# Altium PCB touch-24-v3.PcbDoc
Units mm, origin at the board's own origin, x right, y up, seen from the top; angles counter-clockwise.
Board outline 151 x 86.38 mm, 2 copper layers (Top Layer, Bottom Layer); 49 components, 42 nets, 145 pads, 24 vias.
Unrouted connection lines stored in the file: 2.
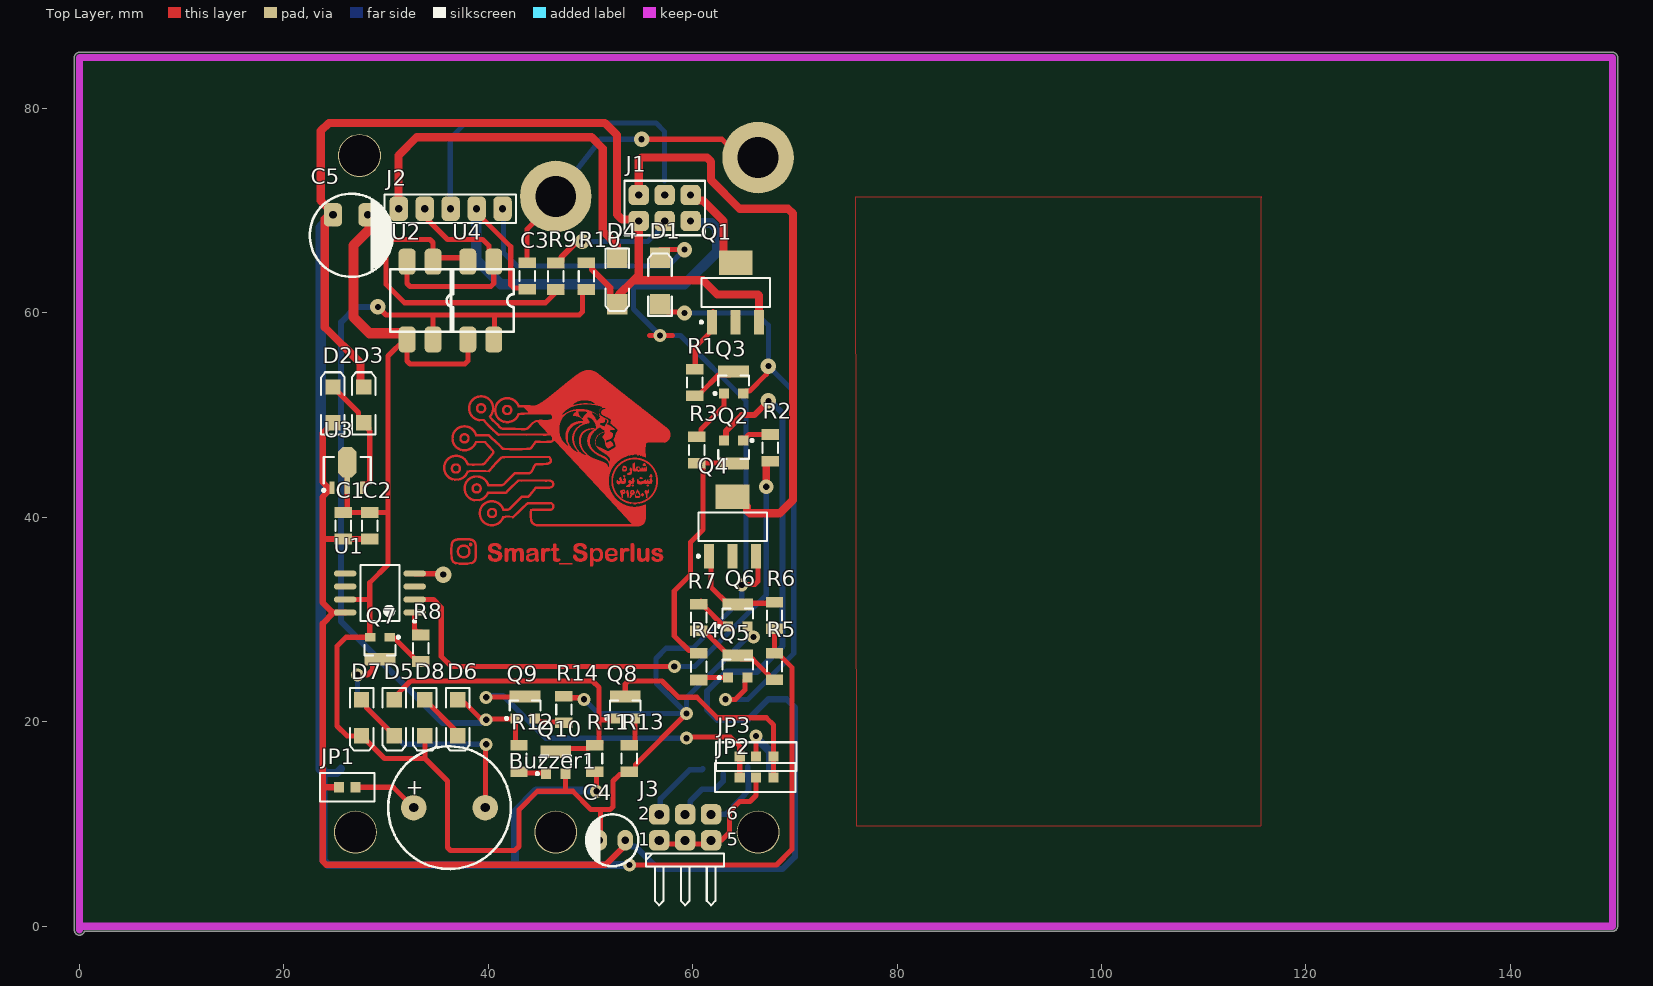
[diagram p0: Top Layer view]
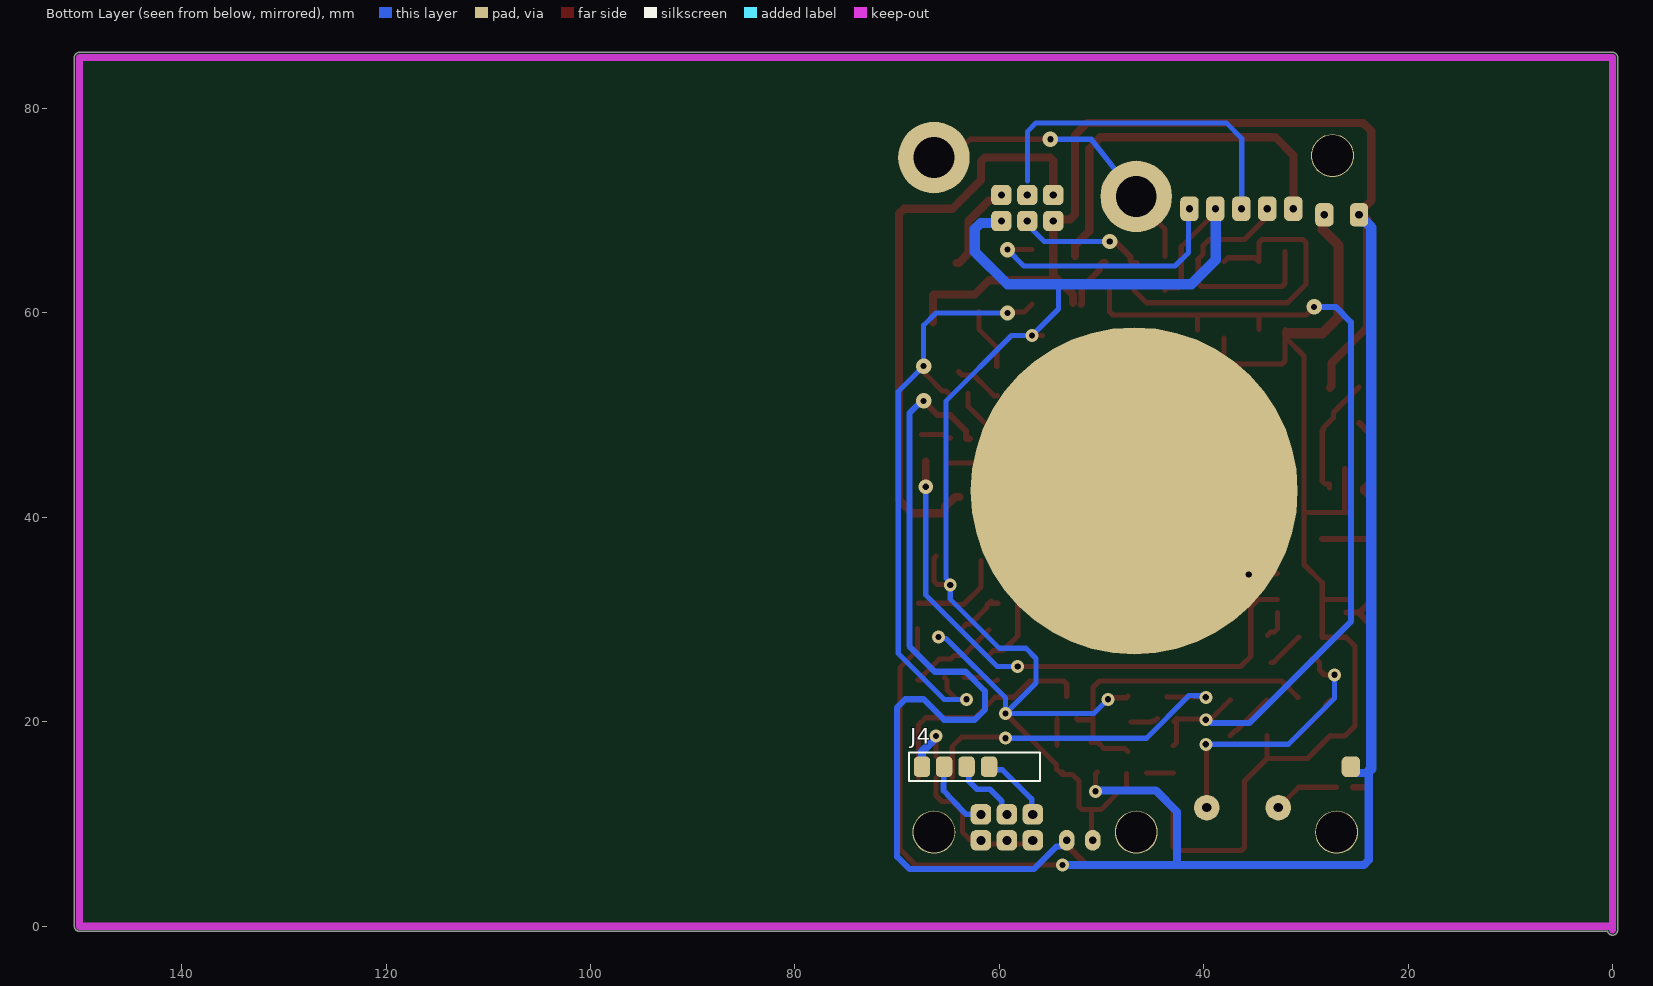
[diagram p1: Bottom Layer view, seen from below]

## Layer stack, top to bottom
Top Solder: solder mask 0.0102, Solder Resist, Dk 3.5
Top Layer: signal copper 0.0356
Dielectric 1: dielectric 0.32, FR-4, Dk 4.8
Bottom Layer: signal copper 0.0356
Bottom Solder: solder mask 0.0102, Solder Resist, Dk 3.5

## Board outline
-0.5,-0.381 -0.5,85 cw(c0,85) 0,85.5 150,85.5 cw(c150,85) 150.5,85 150.5,0 cw(c150,0) 150,-0.5 0.486,-0.5 cw(c0,-0.381)

## Design rules (kind name [scope] priority, off if disabled: settings)
Clearance Clearance_1 [InPolygon] p1: gap=1 ignorepadtopadclearanceinfootprint=FALSE
Clearance [All] p2: gap=0.4 ignorepadtopadclearanceinfootprint=FALSE
PolygonConnect [All] p1: connectstyle=Relief reliefconductorwidth=0.254 reliefentries=4 polygonreliefangle="90 Angle" airgapwidth=0.254
RoutingLayers [All] p1: top layer_v5=FALSE bottom layer_v5=TRUE
RoutingVias [All] p1: holewidth=0.711 width=2.5 viastyle="Through Hole" minholewidth=0.711 minwidth=1.27 maxholewidth=0.711 maxwidth=2
SolderMaskExpansion [All] p1: expansion=0.102 istentingtop=FALSE
Width [All] p1: maxlimit=3 minlimit=0.4 preferedwidth=1
29 further rules are at their usual default settings.

## Components (designator, comment, footprint, x,y, rotation, side; value= is the part's Value field where it differs from the comment)
Buzzer1 "Buzzer" BUZZER 36.2,11.6 r0 top
C1 "=Value" "CAP 1206" 25.8,39.2 r270 top
C2 "=Value" "CAP 1206" 28.4,39.2 r270 top
C3 "=Value" "CAP 1206" 43.8,63.6 r90 top
C4 "=Value" ELEC-CAP-RAD10-20 52.13,8.4 r0 top
C5 "=Value" ELEC-CAP-RAD15-30 26.6,67.6 r180 top
D1 "D Tunnel1" 3.2X1.6X1.1#1 56.8,62.6 r90 top
D2 "D Tunnel1" 3.2X1.6X1.1#2 24.8,51 r90 top
D3 "D Tunnel1" 3.2X1.6X1.1#2 27.8,51 r90 top
D4 "D Tunnel1" 3.2X1.6X1.1#3 52.6,63.4 r270 top
D5 "D Tunnel1" 3.2X1.6X1.1#2 30.8,20.4 r270 top
D6 "D Tunnel1" 3.2X1.6X1.1#2 37,20.4 r270 top
D7 "D Tunnel1" 3.2X1.6X1.1#2 27.6,20.4 r270 top
D8 "D Tunnel1" 3.2X1.6X1.1#2 33.8,20.4 r270 top
J1 "Header3X2" "HEADER 3X2" 54.72,71.54 r0 top
J2 "Header5X1" "HEADER 5X1"#1 31.24,70.2 r0 top
J3 "Header 3X2H" HDR2X3H 56.72,8.4 r0 top
J4 "Header5X1" "HEADER 5X1"#2 57.4,15.6 r0 bottom
JP1 "Jumper" "Header 2X1" 26.2,13.6 r180 top
JP2 "Jumper Selector" "Jumper Selector"#1 68.68,14.546 r180 top
JP3 "Jumper Selector" "Jumper Selector"#2 68.74,16.6 r180 top
Q1 "MOSFET-P4" SOT223_N 64.2,62 r90 top
Q2 "PNP" SOT-23B_N 64,46.4 r270 top
Q3 "QNPN" SOT-23B_L#1 64,53.2 r90 top
Q4 "MOSFET-P4" SOT223_N 63.9,39.1 r90 top
Q5 "QNPN" SOT-23B_L#1 64.4,25.4 r90 top
Q6 "QNPN" SOT-23B_L#1 64.4,30.4 r90 top
Q7 "QNPN" SOT-23B_L#2 29.4,27.2 r270 top
Q8 "QNPN" SOT-23B_L#1 53.4,21.4 r90 top
Q9 "QNPN" SOT-23B_L#1 43.6,21.4 r90 top
Q10 "QNPN" SOT-23B_L#1 46.6,16 r90 top
R1 "10K" "RES 1206 (3216X08L)" 60.2,53.2 r90 top
R2 "10K" "RES 1206 (3216X08L)" 67.6,46.8 r90 top
R3 "10K" "RES 1206 (3216X08L)" 60.4,46.6 r90 top
R4 "10K" "RES 1206 (3216X08L)" 60.6,25.4 r270 top
R5 "10K" "RES 1206 (3216X08L)" 68,25.4 r90 top
R6 "10K" "RES 1206 (3216X08L)" 68,30.4 r90 top
R7 "10K" "RES 1206 (3216X08L)" 60.6,30.2 r90 top
R8 "10K" "RES 1206 (3216X08L)" 33.4,27.2 r270 top
R9 "10K" "RES 1206 (3216X08L)" 46.6,63.6 r270 top
R10 "10K" "RES 1206 (3216X08L)" 49.6,63.6 r90 top
R11 "10K" "RES 1206 (3216X08L)" 50.4,16.4 r270 top
R12 "10K" "RES 1206 (3216X08L)" 43,16.4 r270 top
R13 "10K" "RES 1206 (3216X08L)" 53.8,16.4 r90 top
R14 "10K" "RES 1206 (3216X08L)" 47.4,21.2 r270 top
U1 "ATtiny15L-1SC" 8S2_N 29.4,32.6 r180 top
U2 "PC817" DIP4 34.6,65.02 r270 top
U3 "LM1117MP-3.3" SOT89L 26.2,44.6 r90 top
U4 "PC817" DIP4 40.54,65.02 r270 top

## Footprints (in the part's own frame and the unit in brackets; to place one, negate y for a bottom-side part, rotate by r counter-clockwise, add the part's x,y. Pads: shape width x height; smd on the part's side, far side on the other; paste and mask are expansions set on the pad)
3.2X1.6X1.1#1 [mm] "SMT LED; 2 Flat Leads"
  rect 2x2 smd: 1(-1.75,0) 2(2.8,0)
  silkscreen extent -2.9,-1.15 3.2,1.15
3.2X1.6X1.1#2 [mm] "SMT LED; 2 Flat Leads"
  rect 1.5x1.5 smd: 1(-1.75,0) 2(1.75,0)
  silkscreen extent -2.9,-1.15 3.2,1.15
3.2X1.6X1.1#3 [mm] "SMT LED; 2 Flat Leads"
  rect 2x2 smd: 1(-2,0) 2(2.55,0)
  silkscreen extent -2.9,-1.15 3.2,1.15
8S2_N [mm] "SOP, 8-Leads, Body 5.3x5.3mm, Pitch 1.27mm, IPC Medium Density"
  oval 2.2x0.6 smd: 1(-3.4,1.905) 2(-3.4,0.635) 3(-3.4,-0.635) 4(-3.4,-1.905) 5(3.4,-1.905) 6(3.4,-0.635) 7(3.4,0.635) 8(3.4,1.905)
  silkscreen extent -3.52,-2.75 1.9,2.88, body extent -2.73,-2.75 2.73,2.75, height 2.16
BUZZER [mm] "BUZZER"
  round 2.5 hole 0.9: 1(-3.5,0) 2(3.5,0)
  silkscreen extent -6,-6 6,6
"CAP 1206" [mm]
  rect 1.05x1.7 smd: 1(-1.27,0) 2(1.326,0)
  silkscreen extent -0.47,-0.75 0.53,0.75, body extent -1.49,-0.77 1.55,0.75, height 0.75
DIP4 [mil]
  rrect50% 100x65 smd: 1(0,0) 2(0,-100) 3(300,-100) 4(300,0)
  silkscreen extent 30,-165 270,77, body extent -5,-140 305,40, height 169
ELEC-CAP-RAD10-20 [mil]
  oval 60x80 hole 30: 1(-50,0) 2(50,0)
  silkscreen extent -100,-100 100,100, body extent -124,-124 124,124, height 404
ELEC-CAP-RAD15-30 [mil]
  rrect50% 70x90 hole 30: 1(-62.99,-78.74) 2(70.87,-78.74)
  silkscreen extent -160,-160 160,160, body extent -167,-167 167,167, height 609
HDR2X3H [mm] "Connector; Header; 3x2 Position; Right Angle"
  rrect50% 2x2 hole 0.9: 1(0,0) 2(0,2.54) 3(2.54,0) 4(2.54,2.54) 5(5.08,0) 6(5.08,2.54)
  silkscreen extent -1.27,-6.35 6.35,-1.27
"Header 2X1" [mm]
  rect 1x1 smd: 1(-0.8,0) 2(0.8,0)
  silkscreen extent -2.67,-1.4 2.67,1.4, body extent -2.54,-1.27 2.54,1.27, height 9.5
"HEADER 3X2" [mm]
  rrect50% 2x2 hole 0.7: 1(0,0) 2(0,-2.54) 3(2.54,0) 4(2.54,-2.54) 5(5.08,0) 6(5.08,-2.54)
  silkscreen extent -1.4,-3.94 6.48,1.4, body extent -1.3,-3.81 6.32,1.27, height 8.38
"HEADER 5X1"#1 [mm]
  rrect50% 1.8x2.4 hole 0.7: 1(0,0) 2(2.54,0) 3(5.08,0) 4(7.62,0) 5(10.16,0)
  silkscreen extent -1.4,-1.4 11.46,1.4, body extent -1.22,-1.19 11.48,1.35, height 8.38
"HEADER 5X1"#2 [mm]
  rrect50% 1.8x2 smd: 1(-31.8,0)
  rrect50% 1.6x2 smd: 2(3.6,0) 3(5.8,0) 4(8,0) 5(10.16,0)
  silkscreen extent -1.4,-1.4 11.46,1.4, body extent -1.22,-1.19 11.48,1.35, height 8.38
"Jumper Selector"#1 [mm]
  rect 1x1 smd: 1(2.48,0) 2(0.78,0) 3(4.08,0)
  silkscreen extent -1.4,-1.4 6.48,1.4, body extent -1.24,-1.27 6.38,1.27, height 10.16
"Jumper Selector"#2 [mm]
  rect 1x1 smd: 1(2.54,0) 2(0.84,0) 3(4.14,0)
  silkscreen extent -1.4,-1.4 6.48,1.4, body extent -1.24,-1.27 6.38,1.27, height 10.16
"RES 1206 (3216X08L)" [mm] "Chip Resistor, 2-Leads, Body 3.2x1.6mm, IPC High Density _ (0.125 W)"
  rect 1.05x1.7 smd: 1(-1.295,0) 2(1.301,0)
  silkscreen extent -0.5,-0.75 0.5,0.75, body extent -1.52,-0.76 1.53,0.76, height 0.6
SOT89L [mm] "SOT89, 3-Leads, Body 4.5x2.4 mm, Pitch 1.5mm, Lead Span 4.1mm, IPC High Density"
  rect 1.2x0.5 smd: 1(-1.7,1.5) 3(-1.7,-1.5)
  rect 1.6x0.5 smd: 2(-1.5,0)
  oct 3x1.8 smd: 2(0.8,0)
  silkscreen extent -2.07,-2.3 1.3,2.42, body extent -1.3,-2.3 1.3,2.3, height 1.6
SOT223_N [mm] "SOT223, 4-Leads, Body 6.5x3.5mm, Pitch 2.3mm, Lead Span 7mm, IPC Medium Density"
  rect 2.4x1 smd: 1(-2.9,2.3) 2(-2.9,0) 3(-2.9,-2.3)
  rect 2.4x3.3 smd: 4(2.9,0)
  silkscreen extent -3.02,-3.35 1.4,3.47, body extent -1.85,-3.35 1.85,3.35, height 1.7
SOT-23B_L#1 [mm] "SOT23, 3-Leads, Body 2.9x1.3mm, Pitch 0.95mm, Lead Span 2.4mm, IPC High Density"
  rect 1x1 smd: 1(-1.075,0.95) 2(-1.075,-0.95)
  rect 1.2x3 smd: 3(1.075,0)
  silkscreen extent -1.2,-1.5 0.7,1.92, body extent -0.7,-1.5 0.7,1.5, height 1.14
SOT-23B_L#2 [mm] "SOT23, 3-Leads, Body 2.9x1.3mm, Pitch 0.95mm, Lead Span 2.4mm, IPC High Density"
  rect 0.85x1 smd: 1(-1.075,0.95) 2(-1.075,-0.95)
  rect 1.2x3 smd: 3(1.075,0)
  silkscreen extent -1.2,-1.5 0.7,1.93, body extent -0.7,-1.5 0.7,1.5, height 1.14
SOT-23B_N [mm] "SOT23, 3-Leads, Body 2.9x1.3mm, Pitch 0.95mm, Lead Span 2.4mm, IPC Medium Density"
  rect 1x1 smd: 1(-1.125,0.95) 2(-1.125,-0.95)
  rect 1.2x3 smd: 3(1.125,0)
  silkscreen extent -1.25,-1.5 0.7,1.93, body extent -0.7,-1.5 0.7,1.5, height 1.14

## Part data
C1 C2 C3: library part Capacitor, "Capacitor"
C4 C5: library part "Capacitor Electrolytic", "Electrolytic Capacitor"
D1 D2 D3 D4 D5 D6 D7 D8: "Tunnel Diode - RLC Model", LatestRevisionDate=17-Jul-2002, LatestRevisionNote="Re-released for DXP Platform.", PackageDescription="SM LED; 2 Flat Leads", PackageReference=3.2X1.6X1.1, PackageVersion=Feb-2002, Published=8-Jun-2000, Publisher="Altium Limited"
J3: "Header, 3-Pin, Dual row, Right Angle", LatestRevisionDate=17-Jul-2002, LatestRevisionNote="Re-released for DXP Platform.", Publisher="Altium Limited"
Q1 Q4: "P-Channel MOSFET, Externally Terminated Substrate", Code_IPC=SOT223-4, Code_JEDEC=TO-261-AA-B, Code_JEITA=SC-75, LatestRevisionDate=29-May-2009, LatestRevisionNote="IPC-7351 Footprint Added.", PackageDescription="4-Pin SOT-223 Package 2.3 mm Pitch, 7 mm Lead Span", PackageReference=SOT223, PackageVersion=2002, Published=24-Mar-1999, Publisher="Altium Limited"
Q2: "PNP Bipolar Transistor", LatestRevisionDate=29-May-2009, LatestRevisionNote="IPC-7351 Footprint Added.", PackageDescription="3-Pin SOT-23 Package 0.95 mm Pitch, 2.4 mm Lead Span", PackageReference=SOT-23B, PackageVersion=Aug-1999, Published=8-Jun-2000, Publisher="Altium Limited"
Q3 Q5 Q6 Q7 Q8 Q9 Q10: "NPN Bipolar Transistor", LatestRevisionDate=29-May-2009, LatestRevisionNote="IPC-7351 Footprint Added.", PackageDescription="3-Pin SOT-23 Package 0.95 mm Pitch, 2.4 mm Lead Span", PackageReference=SOT-23B, PackageVersion=Aug-1999, Published=8-Jun-2000, Publisher="Altium Limited"
R1 R2 R3 R4 R5 R6 R7 R8 R9 R10 R11 R12 R13 R14: library part Resistor, "Resistor", Power="1/4 W", Tolerance=5%
U1: "8-Bit AVR Microcontroller with 1K Byte of Flash Memory", Supplier Part Number 1=ATTINY15L-1SC-ND, ComponentLink1Description=Datasheet, ComponentLink1URL=http://www.atmel.com/dyn/resources/prod_documents/doc1187.pdf, ComponentLink2Description="Atmel.com Home", ComponentLink2URL=http://www.atmel.com, DatasheetVersion=1187E-AVR-06/02, LatestRevisionDate=16-Oct-2006, LatestRevisionNote="IPC-7351 Footprint Added.", PackageDescription="8-Lead, 0.208\" Body, Plastic Small Outline Package (EIAJ)", PackageReference=8S2, PackageVersion="revF, Apr-2008", Published=17-Sep-2003, Publisher="Altium Limited", Supplier 1=Digi-Key, Supplier 2=Mouser, Supplier Part Number 2=556-ATTINY15L1SC
U2 U4: library part OPTCOUPLER_01, "4-Pin Phototransistor Optocoupler"
U3: "800mA Low-Dropout Linear Regulator", DigiKeyPartNumber=LM1117MP-3.3CT-ND, Manufacturer="National Semiconductor", PackageTopMarking=XYTT*N05A, PowerWise=N, Code_IPC=SOT223-4, Code_JEDEC=TO-261-AA, ComponentLink1Description="LM1117 Datasheet", ComponentLink1URL=http://www.national.com/ds/LM/LM1117.pdf, ComponentLink2Description="LM1117 Web Page", ComponentLink2URL=http://www.national.com/pf/LM/LM1117.html, ComponentLink3Description="MP04A Package Page", ComponentLink3URL=http://www.national.com/packaging/folders/mp04a.html, CompType="LDO IC", DatasheetVersion=Apr-2006, PackageDescription="Molded SOT-223, 6.50 x 3.56 x 1.6mm Body, 4 Lead, 2.3mm Pitch", PackageReference=MP04A, PackageVersion="revB, Apr-2003", PartNumber=LM1117MP-3.3, PinCount=4, Published=4-Dec-2008, Publisher="Altium Limited", RoHS=O
Buzzer1: ComponentLinkURL=www.picpars.com, Designer="Seyed Mohsen Ghasemain"

## Free pads (board coordinates)
  round 4.2 hole 4: 2(27.4,75.4) 2(66.4,9.2) 3(27,9.2) 4(46.6,9.2)
  round 7 hole 4: 5(46.6,71.4) 5(66.4,75.2)
  round 32 smd far side: 6(46.8,42.6)

## Via types
v1: diameter 1.27, hole 0.6, Top Layer to Bottom Layer, 15 vias
v2: diameter 1.5, hole 0.6, Top Layer to Bottom Layer, 7 vias
v3: diameter 1.4, hole 0.6, Top Layer to Bottom Layer, 1 vias
v4: diameter 1.6, hole 0.6, Top Layer to Bottom Layer, 1 vias

## Nets (pads, with @x,y where several pads share a name; then routed paths per layer and width w, separated by ;. In a path a pad name is that pad's centre, name@x,y a point inside that pad or via, vN(x,y) a via of type N, cw(c..) or ccw(c..) an arc to the next point about the centre after c; other vN are vias at no path point)
ACS: D1.2 J2.5 | length 25.7
  Top Layer w0.5: D1.2@56.8,66.2 v2(59.2,66.2)
  Bottom Layer w0.5: J2.5@41.4,70.297 41.497,70.2 41.497,65.903 42.8,64.6 57.6,64.6 v2(59.2,66.2)
bizer: R8.1 U1.1 | length 2.8
  Top Layer w0.5: U1.1 32.8,29.063 33.093,28.77 33.461,28.77 R8.1@33.768,28.463
GND: C1.1 C2.1 C3.1 C4.1 C5.1 D7.2 D8.2 J1.6 J2.4 pad.2@27.4,75.4 Q4.3 Q6.2 Q7.2 Q10.2 R13.1 R14.1 U1.7 U2.3 U3.2 U4.3 | length 272.1
  Top Layer w0.5: C1.1 C1.1@26.2,40.47 ; U1.7 28.4,31.965 ; U3.2@26.2,44.8 26.2,43.1 C1.1@26.2,40.47 ; D7.2@27.6,18.6 26.2,18.6 25.2,19.6 25.2,27.4 26.075,28.275 28.4,28.275 28.4,31.965 ; D7.2 29.85,16.4 33.8,16.4 ; C2.1@27.965,40.47 C1.1@26.2,40.47 ; C2.1@28,40.47 C2.1 30.2,40.47 ; U2.3@32.06,58.4 U2.3@32.06,57.48 ; D8.2 33.8,16.4 ; U4.3@38,57.543 U4.3 38,55.293 37.707,55 32.353,55 32.06,55.293 U2.3 U2.3@32.06,57.48 ; J2.4@38.88,69.8 42.2,66.48 42.2,62.751 42.493,62.459 43.549,62.459 C3.1@43.807,62.2 ; R14.1 47.548,22.347 49.218,22.347 v1(49.365,22.2) ; Q10.2 47.55,13.2 ; C4.1@50.86,8.2 50.984,8.324 50.984,11.4 ; R13.1 54.125,15.105 54.4,15.38 54.4,15.8 v1(59.4,20.8) ; R13.1@53.85,14.83 52.83,14.83 52.2,14.2 52.2,11.693 51.907,11.4 50.984,11.4 ; 55.8,57.8 v1(56.8,57.8) 58,57.8 ; v1(64.8,33.4) 64.852,33.452 66.107,33.452 66.4,33.744 66.4,36 Q4.3 ; 28.4,31.965 28.4,33.6 30.2,35.4 30.2,40.47 ; 30.2,40.47 30.2,55.8 31.88,57.48 U2.3@32.06,57.48 ; 33.8,16.4 36,14.2 36,7.693 36.293,7.4 42.6,7.4 43,7.8 43,11.4 44.8,13.2 47.55,13.2 ; 47.55,13.2 48.26,13.2 50.06,11.4 50.984,11.4
  Top Layer w1: C5.1@28.384,69.6 28.384,68.184 26.8,66.6 26.8,59.6 28.376,58.024 U2.3@31.86,58.024
  Bottom Layer w0.5: v1(49.365,22.2) 50.765,20.8 v1(59.4,20.8) ; 54.2,62.8 54.2,60.4 v1(56.8,57.8) 58.8,57.8 65.2,51.4 65.2,34.008 64.8,33.608 v1(64.8,33.4) 64.8,32 60,27.2 57.4,27.2 56.4,26.2 56.4,23.8 v1(59.4,20.8) ; v1(65.945,28.309) 65.798,28.162 65.218,28.162 59.4,22.344 v1(59.4,20.8)
  Bottom Layer w1: J2.4@38.82,69.8 38.82,65.2 41.22,62.8 54.2,62.8 59.2,62.8 62.4,66 62.4,68.214 61.814,68.8 J1.6@59.735,68.8
key: J1.3 J2.3 | length 32.4
  Bottom Layer w0.5: 36.28,71.4 36.28,77.08 37.8,78.6 56.4,78.6 57.26,77.74 57.26,72.94
key+: J1.5 Q1.4 | length 9
  Top Layer w0.8: J1.5 60.338,71.002 60.998,71.002 63,69 63,65.85 63.95,64.9 Q1.4
key-: J1.1 Q4.4 | length 57.2
  Top Layer w0.8: J1.1 54.72,74.907 55.013,75.2 61.4,75.2 61.8,74.8 61.8,73 64.6,70.2 69.331,70.2 69.8,69.731 69.8,41.693 68.507,40.4 65.593,40.4 65.3,40.693 65.3,41.05 64.35,42 Q4.4
L1: J3.6 J4.4 | length 7
  Bottom Layer w0.55: J3.6 62.3,10.953 63.264,10.979 63.424,11.139 65.455,13.28 65.455,13.507 65.455,13.514 J4.4
L2: J3.4 J4.3 | length 6.3
  Bottom Layer w0.55: J3.4 59.748,11.428 59.748,12.226 60.922,13.4 62.2,13.4 62.984,14.184 62.984,14.885 62.997,14.898 J4.3@63,14.898
L3: J3.2 J4.2 | length 6.9
  Bottom Layer w0.55: J3.2 56.843,11.063 56.843,12.443 59.697,15.297 60.897,15.297 J4.2@61,15.4
led: D6.1 Q9.1 R10.1 R12.1 U2.4 U4.4 | length 86.4
  Top Layer w0.5: v2(29.2,60.6) 30,59.8 34.6,59.8 ; U2.4@34.6,58.4 34.6,59.8 ; D6.1@37.4,22.15 39.203,20.347 39.653,20.347 v1(39.8,20.2) 39.863,20.263 42.587,20.263 Q9.1 ; U4.4@40.6,58.354 40.6,59.8 ; Q9.1@42.907,20.053 42.65,20.053 42.65,17.97 42.925,17.695 R12.1 ; R10.1@49.2,62.305 49.2,60.093 48.907,59.8 40.6,59.8 ; 34.6,59.8 40.6,59.8
  Bottom Layer w0.6: v2(29.2,60.6) 27.085,60.6 25.6,59.115 25.6,29.8 35.514,19.886 39.305,19.886 39.619,20.2 v1(39.8,20.2)
"led IN": J2.2 U2.2 U4.1 | length 23.2
  Top Layer w0.5: U2.2@32.06,66.02 32.06,62.893 32.353,62.6 40.247,62.6 40.54,62.893 U4.1@40.54,65.2 ; J2.2@33.8,69.4 36,67.2 39.452,67.2 40.065,66.587 40.065,65.735 U4.1@40.6,65.2
Lw: J4.5 JP3.1 | length 5.8
  Top Layer w0.5: JP3.1 v1(66.2,18.6)
  Bottom Layer w0.8: v1(66.2,18.6) 66.2,18.473 67.56,17.113 J4.5@67.56,15.4
NetBuzzer1_1: Buzzer1.1 JP1.1 | length 6.5
  Top Layer w0.5: JP1.1 30.7,13.6 Buzzer1.1
NetBuzzer1_2: Buzzer1.2 Q7.3 | length 26.1
  Top Layer w0.5: v1(27.2,24.6) 27.221,24.579 28.179,24.579 28.668,25.068 28.668,25.775 29.018,26.125 Q7.3@29.45,26.125 ; Buzzer1.2@39.8,11.8 39.725,11.875 39.725,17.725 v1(39.8,17.8)
  Bottom Layer w0.5: v1(27.2,24.6) 27.2,22.292 31.692,17.8 v1(39.8,17.8)
NetD1_1: D1.1 Q3.2 Q5.2 | length 60.6
  Top Layer w0.5: D1.1 57.55,60.1 59.1,60.1 v2(59.2,60) ; v1(63.2,22.2) 64.2,22.2 65.1,23.1 65.1,24.075 Q5.2 ; Q3.2 65.2,52.375 65.575,52.375 67.209,54.009 67.209,54.609 v2(67.4,54.8)
  Bottom Layer w0.5: v2(59.2,60) 66.2,60 67.4,58.8 v2(67.4,54.8) 69.885,52.315 69.885,26.685 65.4,22.2 v1(63.2,22.2)
NetD2_2: D2.2 D3.1 U3.3 | length 12
  Top Layer w0.5: D2.2 27.3,50.25 27.3,49.75 D3.1 ; U3.3 27.7,43.25 28.107,43.25 28.4,43.543 28.4,48.45 28.3,48.55 28.3,48.75 D3.1@27.7,49.35
NetD4_1: D4.1 J2.1 | length 37.6
  Top Layer w0.8: J2.1@31.2,70.067 31.2,75.4 33,77.2 50.1,77.2 51.2,76.1 51.2,68 52.6,66.6 D4.1@52.6,65.6
NetD5_1: D5.1 Q8.1 Q10.3 R11.1 | length 32.1
  Top Layer w0.5: D5.1@30.8,22.4 32.4,24 50.2,24 50.85,23.35 50.85,20.2 ; Q10.3@47.4,17.075 47.725,17.4 49.78,17.4 50.35,17.97 51,17.97 50.85,17.97 50.85,20.2 ; Q8.1 52.325,20.2 50.85,20.2
NetD5_2: D5.2 D7.1 | length 4.8
  Top Layer w0.5: D7.1 28.1,21.65 28.1,21.35 D5.2
NetD6_2: D6.2 D8.1 | length 5
  Top Layer w0.5: D8.1 36.8,19.15 36.9,19.15 D6.2@37.4,18.65
NetJ1_4: J1.4 R9.1 | length 12.4
  Top Layer w0.6: R9.1 46.925,64.895 47.15,65.12 47.15,65.445 48.532,66.828 49.028,66.828 v2(49.2,67)
  Bottom Layer w0.5: v2(49.2,67) 55.6,67 J1.4@57.26,68.66
NetJ3_1: J3.1 J3.3 J3.5 JP2.1 | length 13.8
  Top Layer w0.5: J3.1@57.493,8.087 57.52,8.06 J3.5@62.14,8.06 ; J3.5 62.127,8.4 62.187,8.461 62.861,8.461 63.6,9.2 63.6,11.2 64.6,12.2 65.6,12.2 66.2,12.8 JP2.1 ; J3.5@62.127,8.213 J3.5@62.14,8.2
NetJP2_2: JP2.2 JP3.2 Q8.3 | length 22.8
  Top Layer w0.5: Q8.3 53.4,23.707 53.693,24 57,24 58.6,22.4 60.4,22.4 62.4,20.4 67.2,20.4 67.9,19.7 JP3.2 JP2.2
NetJP2_3: JP2.3 JP3.3 Q9.3 | length 33.9
  Top Layer w0.5: v1(39.8,22.4) 39.837,22.438 43.562,22.438 Q9.3 ; v1(59.409,18.391) 59.513,18.496 63.704,18.496 64.6,17.6 JP3.3 JP2.3
  Bottom Layer w0.5: v1(39.8,22.4) 39.947,22.547 40.917,22.547 40.935,22.565 41.435,22.565 45.609,18.391 v1(59.409,18.391)
NetQ1_1: Q1.1 R1.2 | length 6.1
  Top Layer w0.5: R1.2@60.252,54.746 60.252,56.652 62,58.4 Q1.1@62,60.115
NetQ2_1: Q2.3 R3.1 R4.1 | length 26.3
  Top Layer w0.5: R3.1 R3.1@60.725,45.305 ; R4.1@60.946,26.6 60.575,26.97 59.63,26.97 58.2,28.4 58.2,32.8 59.8,34.4 59.8,37.6 61,38.8 61,45.03 R3.1@60.725,45.305 ; Q2.3@65.069,45.305 R3.1@60.725,45.305
NetQ2_2: Q2.1 R2.2 | length 3
  Top Layer w0.5: Q2.1@64.8,47.775 65.2,47.775 65.2,47.808 65.493,48.101 R2.2
NetQ3_1: Q3.3 R1.1 | length 4.8
  Top Layer w0.5: R1.1 60.525,51.905 60.8,52.18 60.8,52.2 62.525,53.925 63.65,53.925 Q3.3
NetQ3_2: Q3.1 R3.2 | length 5.6
  Top Layer w0.5: R3.2@60.2,47.901 60.525,47.901 60.8,48.176 60.8,48.6 63.05,50.85 Q3.1
NetQ4_1: Q4.1 Q6.3 R6.2 | length 9.5
  Top Layer w0.5: Q4.1@61.8,35.771 61.8,33.175 63.5,31.475 Q6.3 64.525,31.6 R6.2@67.9,31.6
NetQ5_1: Q5.3 R5.1 R7.1 | length 9.2
  Top Layer w0.5: R7.1@61,29 63.15,26.85 63.15,26.825 63.5,26.475 Q5.3 64.75,26.125 65.875,26.125 67.4,24.6 67.4,24.38 67.675,24.105 R5.1
NetQ5_2: Q5.1 R4.2 | length 3.1
  Top Layer w0.5: R4.2@60.2,24.099 R4.2@60.26,24.039 ; R4.2@60.6,23.899 60.925,23.899 61.351,24.325 Q5.1
NetQ6_2: Q6.1 R7.2 | length 4.5
  Top Layer w0.5: R7.2@60.125,31.597 R7.2@60.829,31.597 ; R7.2@60.829,31.797 61.2,31.426 61.2,31.2 62.825,29.575 63.2,29.575 Q6.1
NetQ7_2: Q7.1 R8.2 | length 3.7
  Top Layer w0.5: Q7.1@30.707,28.293 32.8,26.2 32.8,26.174 33.162,25.812 R8.2@33.388,25.812
NetQ8_3: Q8.2 R13.2 | length 2.6
  Top Layer w0.5: R13.2@54.35,17.688 Q8.2
NetQ9_3: Q9.2 R14.2 | length 2.7
  Top Layer w0.5: Q9.2 44.8,20.075 44.992,20.075 45.093,19.974 R14.2@47.125,19.974
NetQ10_2: Q10.1 R12.2 | length 2.6
  Top Layer w0.5: R12.2@42.98,15 Q10.1@45.6,15
NetR9_2: R9.2 U2.1 U4.2 | length 32.6
  Top Layer w0.5: U4.2 37.62,65.4 34.98,65.4 U2.1 34.6,66.907 34.307,67.2 30.293,67.2 30,66.907 30,62.8 31.8,61 45.6,61 R9.2@46.8,62.2
out: R2.1 U1.2 | length 55.5
  Top Layer w0.5: U1.2 34.635,31.965 35.4,31.2 35.4,26.4 36.4,25.4 v1(58.2,25.4)
  Top Layer w0.7: v3(67.2,43) R2.1@67.2,45.505
  Bottom Layer w0.5: v1(58.2,25.4) 60.2,25.4 67.2,32.4 v3@67.2,42.6
touch: pad.6 U1.4 | length 2.8
  Top Layer w0.5: U1.4 32.819,34.486 35.514,34.486 v4(35.6,34.4)
vcc: C1.2 C2.2 C4.2 D2.1 JP1.2 Q2.2 U1.8 U3.1 | length 167.6
  Top Layer w0.6: 24.703,30.765 23.8,31.668 23.8,37.951 ; 24.788,30.695 U1.8 ; D2.1 23.8,48.25 23.8,43.45 24.401,42.849 24.401,42.6 23.8,41.999 23.8,37.951 ; 24.847,30.647 23.8,29.6 23.8,13.6 ; JP1.2 23.8,13.6 ; C1.2@25.6,37.874 24,37.874 23.923,37.951 23.8,37.951 ; C1.2 C2.2 ; C4.2@53.5,8.03 51.481,6.011 24.151,6.011 23.8,6.362 23.8,13.6 ; Q2.2@62.888,47.688 63.213,47.688 63.25,47.725 63.25,48.45 64.8,50 66.042,50 67.4,51.358 v2(67.4,51.4)
  Bottom Layer w0.6: C4.2@53.4,8.2 53.596,8.2 53.996,7.8 54.4,7.8 56.6,5.6 68.8,5.6 70,6.8 70,21.4 69.2,22.2 67.4,22.2 65.4,20.2 62.4,20.2 61.4,21.2 61.4,23 63.3,24.9 66.3,24.9 68.8,27.4 68.8,50.2 67.6,51.4 v2(67.4,51.4)
vdd: C5.2 D3.2 D4.2 J1.2 J4.1 Q1.3 R5.2 R6.1 R10.2 R11.2 | length 248.8
  Top Layer w0.5: R11.2 50.6,14.899 v1(50.6,13.2) ; v1(53.8,6) 68.2,6 69.7,7.5 69.7,25.326 68.325,26.701 R5.2 R6.1
  Top Layer w0.6: R10.2@49.6,65 49.826,65 50.15,64.676 50.15,64.25 51.939,62.461 51.939,60.887 D4.2@52.026,60.8
  Top Layer w0.8: C5.2@24.506,69.894 C5.2@24.606,69.794 ; C5.2 C5.2@24.606,69.794 ; D3.2@27.659,52.691 27.5,52.85 27.5,55.1 24,58.6 24,69.188 C5.2@24.606,69.794 ; D4.2@52.8,61 52.8,61.8 54.2,63.2 ; Q1.3 66.5,61.7 66.4,61.8 62.4,61.8 61,63.2 54.2,63.2 ; C5.2@24.606,69.794 24.706,69.894 24.706,70.124 24.514,70.316 24.284,70.316 23.6,71 23.6,77.8 24.4,78.6 51.4,78.6 52.6,77.4 52.6,69.621 53.069,69.153 54.567,69.153 J1.2 54.72,63.72 54.2,63.2
  Bottom Layer w0.8: 23.85,15.15 23.85,15 ; J4.1@25.6,15.4 25.2,15 23.85,15 ; v1(50.6,13.2) 50.51,13.29 44.69,13.29 42.6,11.2 42.6,6 ; v1(53.8,6) 42.6,6 ; 23.85,15 23.85,6.469 24.319,6 42.6,6
  Bottom Layer w1: 23.85,15.15 23.6,15.4 23.6,68.371 24.186,68.957 24.611,68.957 25,69.346 C5.2@25,69.6
pads on no net: C3.2 Q1.2 Q4.2 U1.3 U1.5 U1.6
copper on no net: | length 29.1
  Top Layer w0.5: 43.8,65.526 43.8,68.2 45.6,70 46.2,70 ; v2(55,77) 62.857,77 64.657,75.2 66.4,75.2
  Bottom Layer w0.5: 46.6,71.4 51,77 v2(55,77)

## Polygon pours and split planes (outlines as drawn)
GND on Top Layer "NONET_L01_P024" (hatched 90Degree grid 0.5 track 0.2, shelved, pour order 24): 75.946,71.374 115.697,71.374 115.57,71.247 115.57,9.779 76.073,9.779

## Keep-outs
Keep-Out Layer:
  lines w0.7: 0,-0.381 0,85 150,85 150,0 0,0

## Other copper
Top Layer:
  drawing of 44 lines, arcs and shapes, not listed

## Silkscreen, mask and mechanical layers (free items; w line width, h text height)
Bottom Solder:
  lines w0.2: 22.914,5.185 70.539,5.185 70.539,79.353 22.914,79.353 22.914,5.185
Drill Guide:
  lines w0.2: 73.2,20.2 116,20.2 116,63.6 73.2,63.6 73.2,20.2

## Text inside footprints (layer, text, board x,y; h text height)
Buzzer1: Top Overlay "+" at 31.939,12.87 h1.52
J3: Top Overlay "2" at 54.688,10.432 h1.27; Top Overlay "1" at 54.688,7.892 h1.27; Top Overlay "5" at 63.324,7.892 h1.27; Top Overlay "6" at 63.324,10.432 h1.27